# Altium PCB AIRZAI_LED_SENSE_FLEX_REVA.PcbDoc (part 1 of 2)
Units mm, origin at the board's own origin, x right, y up, seen from the top; angles counter-clockwise.
Board outline 70.94 x 92.79 mm, 2 copper layers (Top Layer, Bottom Layer); 62 components, 41 nets, 168 pads, 73 vias.
Unrouted connection lines stored in the file: 86.
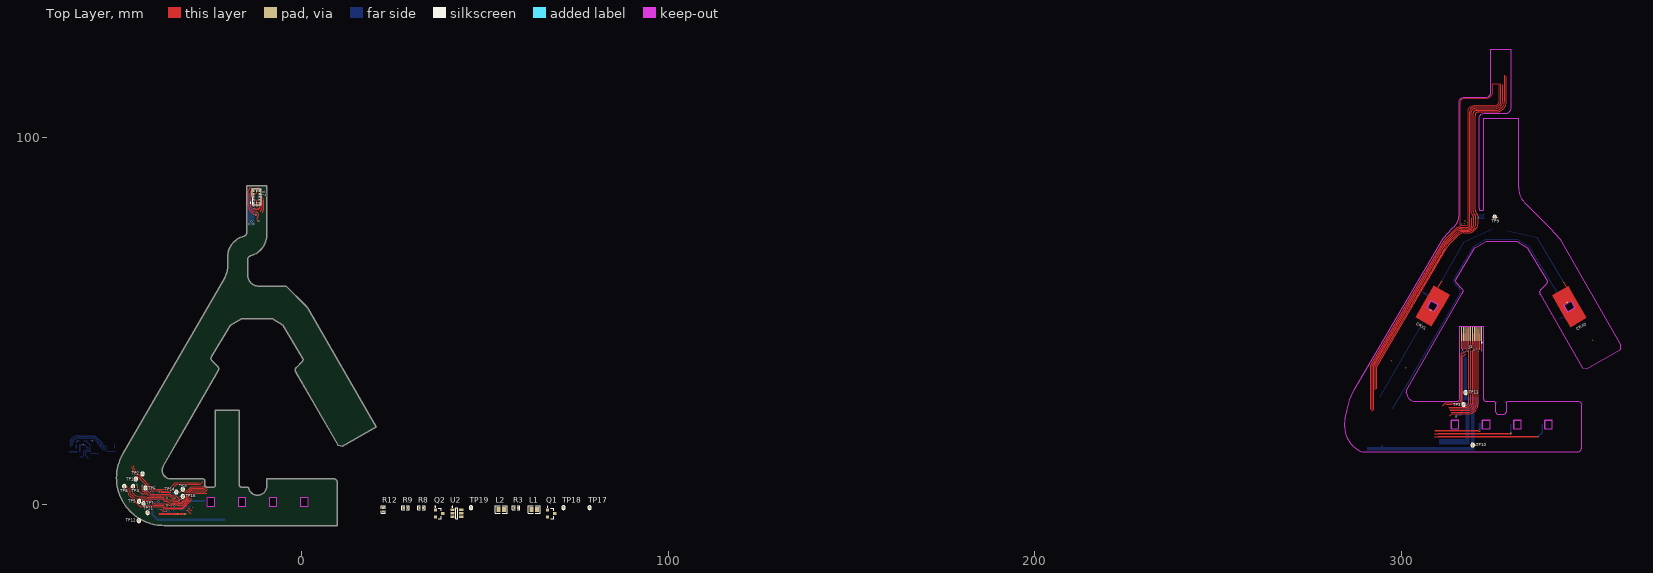
[diagram p0: Top Layer view]
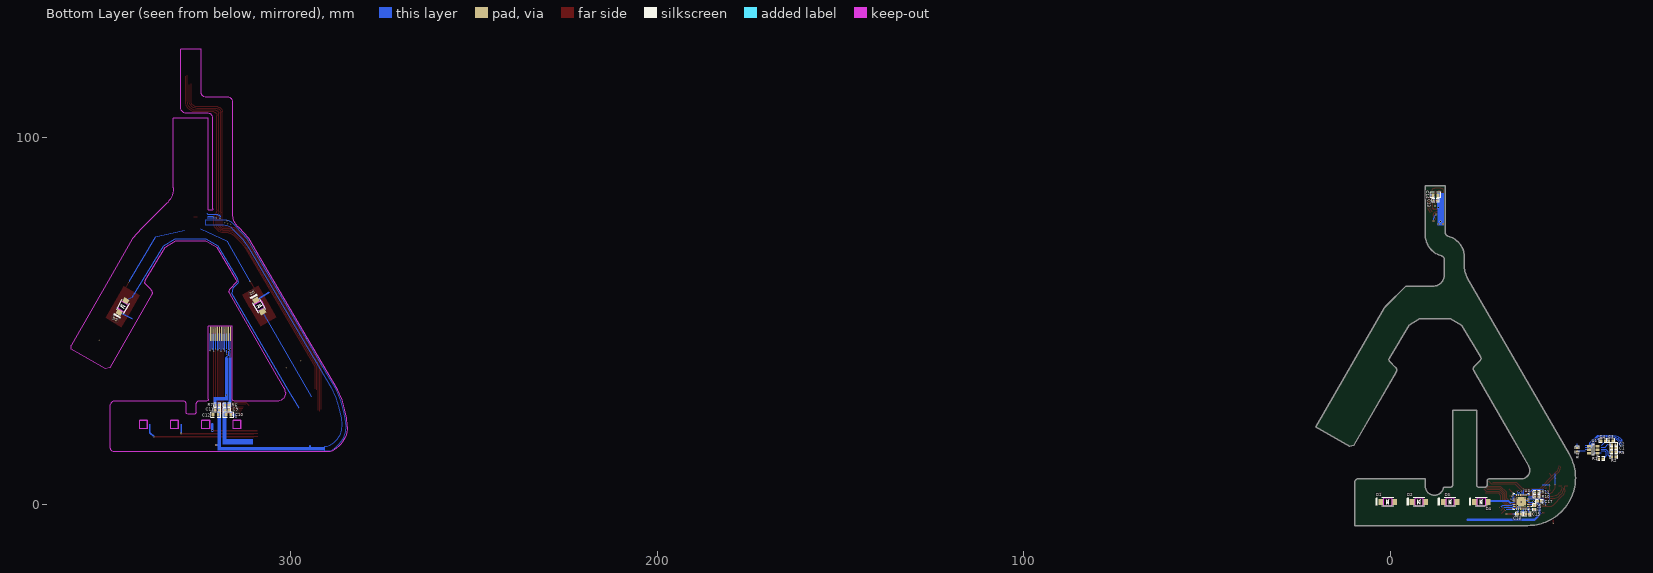
[diagram p1: Bottom Layer view, seen from below]

## Layer stack, top to bottom
Top Solder: solder mask 0.0102, Solder Resist, Dk 3.5
Top Layer: signal copper 0.0356
Dielectric 1: dielectric 0.32, FR-4, Dk 4.8
Bottom Layer: signal copper 0.0356
Bottom Solder: solder mask 0.0102, Solder Resist, Dk 3.5

## Board outline
-34.465,6.945 -27.054,6.946 -26.948,6.942 -26.72,6.84 -26.556,6.67 -26.469,6.446 -26.469,5.146 -26.382,4.923 -26.218,4.753 -25.99,4.651 -25.884,4.646 -24.362,4.651 -24.094,4.651 -23.87,4.738 -23.7,4.902 -23.599,5.13 -23.594,5.236 -23.594,25.651 -17.094,25.651 -17.094,5.194 -17.094,5.145 -17.003,4.92 -16.836,4.751 -16.606,4.654 -14.599,4.651 ccw(c-12.117,4.949) -9.617,4.949 -9.617,6.949 8.752,6.948 8.948,6.909 9.133,6.833 9.299,6.722 9.441,6.58 9.552,6.414 9.629,6.229 9.668,6.033 9.668,-5.816 -37.601,-5.814 cw(c-37.601,7.186) -48.859,13.686 -21.092,61.777 ccw(c-26.288,64.777) -20.288,64.777 -20.288,67.357 cw(c-14.288,67.356) -15.82,73.157 ccw(c-16.075,74.124) -15.075,74.124 -15.075,77.877 -15.075,77.893 -15.075,79.471 -15.075,86.971 -9.575,86.971 -9.575,79.471 -9.575,77.893 -9.575,77.876 -9.575,73.572 cw(c-15.575,73.572) -14.043,67.771 ccw(c-13.788,66.805) -14.788,66.805 -14.788,62.515 ccw(c-11.788,62.515) -11.788,59.515 -4.309,59.515 1.062,54.144 1.617,53.537 20.337,21.111 11.136,15.815 11.091,15.789 9.869,16.118 -1.648,36.137 -1.698,36.205 -1.769,36.36 -1.811,36.537 -1.812,36.707 -1.788,36.863 -1.728,37.022 -1.639,37.166 -1.524,37.291 -1.455,37.341 0.078,38.918 0.23,39.147 0.306,39.477 0.23,39.807 -5.207,48.878 -8.066,50.607 -16.066,50.642 -16.246,50.642 -16.422,50.641 -19.551,48.794 -24.747,40.124 -24.823,39.794 -24.747,39.463 -24.594,39.235 -23.061,37.657 -22.993,37.607 -22.877,37.482 -22.788,37.338 -22.729,37.178 -22.705,37.024 -22.706,36.854 -22.748,36.676 -22.819,36.521 -22.869,36.453 -32.634,19.483 -37.776,10.547 -37.875,10.374 -38.026,10.008 -38.121,9.611 -38.13,9.215 -38.091,8.833 -37.981,8.452 -37.81,8.095 -37.58,7.772 -37.3,7.492 -36.977,7.262 -36.621,7.09 -36.24,6.98 -36.031,6.947
cut-out: -0.417,-0.517 1.683,-0.517 1.683,1.783 -0.417,1.783
cut-out: -8.917,-0.517 -6.817,-0.517 -6.817,1.783 -8.917,1.783
cut-out: -17.417,-0.517 -15.317,-0.517 -15.317,1.783 -17.417,1.783
cut-out: -25.917,-0.517 -23.817,-0.517 -23.817,1.783 -25.917,1.783
cut-out: 339.166,20.639 341.266,20.639 341.266,22.939 339.166,22.939
cut-out: 330.666,20.639 332.766,20.639 332.766,22.939 330.666,22.939
cut-out: 322.166,20.639 324.266,20.639 324.266,22.939 322.166,22.939
cut-out: 313.666,20.639 315.766,20.639 315.766,22.939 313.666,22.939
cut-out: 345.44,52.452 344.396,54.265 346.389,55.412 347.433,53.599
cut-out: 307.092,53.76 309.086,52.613 310.129,54.426 308.136,55.573

## Design rules (kind name [scope] priority, off if disabled: settings)
Clearance Clearance_Board_Cutout_Electrodes [(InComponent('CRX0') OR InComponent('CRX1')) vs OnLayer('Multi-Layer')] p1: gap=0 ignorepadtopadclearanceinfootprint=FALSE
Clearance Clearance_Board_Cutout_Diodes [(InComponent('D1') OR InComponent('D2') OR InComponent('D3') OR InComponent('D4') OR InComponent('D5') OR InComponent('D6')) vs OnLayer('Multi-Layer')] p2: gap=0 ignorepadtopadclearanceinfootprint=FALSE
Clearance Clearance_Keepout [(OnLayer('Keep-Out Layer')) vs (InComponent('D1') OR InComponent('D2') OR InComponent('D3') OR InComponent('D4') OR InComponent('D5') OR InComponent('D6') OR InComponent('CRX0') OR InComponent('CRX1') OR InComponent('J1'))] p3: gap=0 ignorepadtopadclearanceinfootprint=FALSE
Clearance Clearance_GND_POLY_ELECTRODE [(InComponent('CRX0') OR InComponent('CRX1') OR InComponent('CRX2') OR InNet('NetCRX0_1') OR InNet('NetCRX1_1') OR InNet('NetCRX2_1') OR InNet('NetR4_2') OR InNet('NetR2_1') OR InNet('NetR1_1')) vs (InNet('GND') AND InPolygon)] p4: gap=0.762 ignorepadtopadclearanceinfootprint=FALSE
Clearance Clearance_POLYGON_KEEPOUT [(OnLayer('Keep-Out Layer')) vs (InNet('GND') AND InPolygon)] p5: gap=0.254 ignorepadtopadclearanceinfootprint=FALSE
Clearance Clearance_GND_POLY_REST [All vs (InNet('GND') AND InPolygon)] p6: gap=0.254 ignorepadtopadclearanceinfootprint=FALSE
Clearance [All] p7: gap=0.152 ignorepadtopadclearanceinfootprint=FALSE
MinimumSolderMaskSliver [All] p1: minsoldermaskwidth=0.025
PolygonConnect [All] p1: connectstyle=Direct reliefconductorwidth=0.254 reliefentries=4 polygonreliefangle="90 Angle" airgapwidth=0.254
RoomDefinition AIRZAI_LED_SENSE_FLEX_REVA [InComponentClass('AIRZAI_LED_SENSE_FLEX_REVA')] p1: confinementstyle=ConfineIn formatcopy=TRUE lockcomponents=FALSE outline -122.457,-96.252 249.907,-96.252 249.907,147.588 -122.457,147.588
RoutingVias [All] p1: holewidth=0.711 width=1.27 viastyle="Through Hole" minholewidth=0.203 minwidth=0.406 maxholewidth=0.711 maxwidth=1.27
SilkToSilkClearance [All] p1: silktosilkclearance=0.025
SilkToSolderMaskClearance [IsPad] p1: minsilkscreentomaskgap=0.051 clearancetoexposedcopper=TRUE
SolderMaskExpansion [All] p1: expansion=0.102
UnRoutedNet [All] p1: checkbadconnections=TRUE
Width [All] p1: maxlimit=2.54 minlimit=0.152 preferedwidth=0.254
26 further rules are at their usual default settings.

## Components (designator, comment, footprint, x,y, rotation, side; value= is the part's Value field where it differs from the comment)
C1 "22nF" 0402CAP -61.068,15.262 r0 bottom
C2 "0.1µF" 0402CAP -61.043,16.23 r0 bottom
C3 "22nF" 0402CAP -60.248,17.312 r0 bottom
C4 "0.1µF" 0402CAP -58.139,17.327 r180 bottom
C9 "0.1µF" 0402CAP 317.425,25.656 r180 bottom
C10 "10µF" 0603 317.044,24.386 r180 bottom
C11 "0.1µF" 0402CAP 320.138,25.668 r0 bottom
C12 "10µF" 0603 320.519,24.398 r0 bottom
C13 "0.1µF" 0402CAP -12.376,82.866 r0 bottom
C14 "4.7µF" 0603 -12.376,84.339 r180 bottom
C15 "CAP 1uF 16V 0402(1005)" CAPC0402(1005)60_M -37.536,-2.739 r0 bottom value=1uF
C16 "CAP 1uF 16V 0402(1005)" CAPC0402(1005)60_M -39.412,-0.858 r270 bottom value=1uF
C17 "CAP 1uF 16V 0402(1005)" CAPC0402(1005)60_M -40.712,0.772 r0 bottom value=1uF
C18 "CAP 1uF 16V 0402(1005)" CAPC0402(1005)60_M -35.275,-2.739 r0 bottom value=1uF
CRX0 "CONTACT POINT 1" "CONTACT_POINT_1CM _SQ" 345.914,53.932 r300 top
CRX1 "CONTACT POINT 1" "CONTACT_POINT_1CM _SQ" 308.611,54.093 r60 top locked
D1 "WHITE" LED1206_LTW-C230DS 0.633,0.633 r0 bottom locked
D2 "WHITE" LED1206_LTW-C230DS -7.867,0.633 r0 bottom locked
D3 "WHITE" LED1206_LTW-C230DS -16.367,0.633 r0 bottom locked
D4 "WHITE" LED1206_LTW-C230DS -24.867,0.634 r0 bottom
D5 "WHITE" LED1206_LTW-C230DS 308.611,54.093 r60 bottom
D6 "WHITE" LED1206_LTW-C230DS 345.914,53.932 r300 bottom
J1 "FFC Pads" FFC_Pads 319.227,46.546 r0 top
L1 "CB2012T100KR" 0805 63.446,-1.484 r0 top value=10uH
L2 "CB2012T100KR" 0805 54.429,-1.484 r0 top value=10uH
Q1 "NTR4003NT1G" SOT-23-3-NTR4003NT1G 68.018,-2.551 r0 top
Q2 "NTR4003NT1G" SOT-23-3-NTR4003NT1G 37.436,-2.551 r0 top
R1 "10k 0402(1005)" 0402 -57.535,12.409 r0 bottom value=10k
R2 "100R 0402(1005)" 0402 -61.065,12.892 r180 bottom value=100
R3 "Jumper 0402(1005)" 0402 58.493,-0.976 r0 top value=0R
R4 "DNP 0402(1005)" 0402 -51.061,14.867 r270 bottom value=DNP
R5 "DNP 0402(1005)" 0402 -61.068,14.327 r0 bottom value=DNP
R6 "100R 0402(1005)" 0402 317.445,27.016 r180 bottom value=100
R7 "10k 0402(1005)" 0402 320.089,26.995 r0 bottom value=10k
R8 "Jumper 0402(1005)" 0402 32.61,-0.976 r0 top value=0R
R9 "DNP 0402(1005)" 0402 28.292,-0.976 r0 top value=DNP
R10 "Jumper 0402(1005)" 0402 -40.022,2.087 r0 bottom value=0R
R11 "Jumper 0402(1005)" 0402 -40.022,3.23 r0 bottom value=0R
R12 "DNP 0402(1005)" 0402 22.196,-1.484 r90 top value=DNP
TP1 "Test Point" TP_0.9MM -45.343,6.844 r90 top
TP2 "Test Point" TP_0.9MM -43.514,8.287 r90 top
TP3 "Test Point" TP_0.9MM 317.044,27.185 r90 top
TP4 "Test Point" TP_0.9MM -46.054,4.882 r90 top
TP5 "Test Point" TP_0.9MM -44.429,0.787 r90 top
TP6 "Test Point" TP_0.9MM -42.692,4.394 r90 top
TP7 "Test Point" TP_0.9MM -43.2,0.152 r90 top
TP8 "Test Point" TP_0.9MM -48.493,4.882 r90 top
TP9 "Test Point" TP_0.9MM 325.523,78.348 r90 top
TP10 "Test Point" TP_0.9MM 319.533,16.136 r90 top
TP11 "Test Point" TP_0.9MM -42.108,-2.312 r90 top
TP12 "Test Point" TP_0.9MM -44.505,-4.484 r90 top
TP13 "Test Point" TP_0.9MM 317.603,30.491 r90 top
TP14 "Test Point" TP_0.9MM -34.285,3.336 r90 top
TP15 "Test Point" TP_0.9MM -32.504,4.089 r90 top
TP16 "Test Point" TP_0.9MM -32.507,2.159 r90 top
TP17 "Test Point" TP_0.9MM 78.508,-0.951 r90 top
TP18 "Test Point" TP_0.9MM 71.396,-0.951 r90 top
TP19 "Test Point" TP_0.9MM 46.148,-0.951 r90 top
U1 "AT42QT1010-TSHR" SOT-23-6-AT42QT1010-TSHR -55.422,14.892 r0 bottom
U2 "AT42QT1010-TSHR" SOT-23-6-AT42QT1010-TSHR 42.287,-2.475 r0 top
U3 "LP55231SQE/NOPB" WQFN-24-LP55231SQE/NOPB -35.785,0.655 r0 bottom value="IC LED DRIVER RGLTR DIM 24WQFN"
U7 "VL53L0CXV0DH/1" VL53L0X -12.338,83.895 r270 top

## Footprints (in the part's own frame and the unit in brackets; to place one, negate y for a bottom-side part, rotate by r counter-clockwise, add the part's x,y. Pads: shape width x height; smd on the part's side, far side on the other; paste and mask are expansions set on the pad)
0402 [mm] "Chip Resistor, Body 1.1x0.5mm, IPC High Density"
  rect 0.6x0.6 smd: 1(-0.5,0) 2(0.5,0)
  silkscreen extent -1.02,-0.51 1.02,0.51, body extent -0.5,-0.25 0.5,0.25, height 0.27
0402CAP [mm] "Chip Capacitor, Body 1.1x0.5mm, IPC High Density"
  rect 0.6x0.6 smd: 1(-0.5,0) 2(0.5,0)
  silkscreen extent -1.02,-0.51 1.02,0.51, body extent -0.5,-0.3 0.5,0.3, height 0.19
0603 [mm] "Chip Resistor, Body 1.6x0.8mm, IPC High Density"
  rect 0.8x0.9 smd: 1(-0.7,0) 2(0.7,0)
  silkscreen extent -1.4,-0.76 1.4,0.76, body extent -0.8,-0.41 0.8,0.4, height 0.37
0805 [mm] "Chip Resistor, Body 2.0x1.3mm, IPC High Density"
  rect 1.1x1.4 smd: 1(-0.75,0) 2(0.75,0)
  silkscreen extent -1.65,-1.02 1.65,1.02, body extent -1.02,-0.64 0.98,0.62, height 0.47
CAPC0402(1005)60_M [mm] "Chip Capacitor, Body 1.0x0.5mm, Height 0.6mm, IPC Low Density"
  rect 0.72x0.72 smd: 1(-0.5,0) 2(0.5,0)
  silkscreen extent -1.02,-0.51 1.02,0.51, body extent -0.55,-0.3 0.55,0.3, height 0.6
"CONTACT_POINT_1CM _SQ" [mm]
  rect 0.4x0.4 smd paste-2 mask-2: 1(-1.312,-0.018)
  Top Layer region: -2.48,2.5 -1.05,1.15 1.05,1.15 1.05,-2.5 5,-2.5 5,2.5
  Top Layer region: 2.48,-2.5 1.05,-1.15 -1.05,-1.15 -1.05,2.5 -5,2.5 -5,-2.5
FFC_Pads [mm] "(0.50mm"
  rect 0.3x4 smd: 1(2.75,0) 2(2.25,0) 3(1.75,0) 4(1.25,0) 5(0.75,0) 6(0.25,0) 7(-0.25,0) 8(-0.75,0) 9(-1.25,0) 10(-1.75,0) 11(-2.25,0) 12(-2.75,0)
  rect 0.3x4 smd far side: 1(2.75,0) 2(2.25,0) 3(1.75,0) 4(1.25,0) 5(0.75,0) 6(0.25,0) 7(-0.25,0) 8(-0.75,0) 9(-1.25,0) 10(-1.75,0) 11(-2.25,0) 12(-2.75,0)
  silkscreen extent 2.64,-2.56 2.89,-2.31
LED1206_LTW-C230DS [mm] "Chip Capacitor, Body 3.2x1.6mm, IPC High Density"
  rect 1.5x1.6 smd paste-0.1 mask+0.07: 1(1.775,0) 2(-1.775,0)
  silkscreen extent -1.6,-1.13 3.19,1.13, body extent -1.63,-0.8 1.63,0.8, height 0.31
SOT-23-3-NTR4003NT1G [mm] "SOT23, 3-Leads, Body 2.92x1.3mm, Pitch 0.95mm"
  rect 0.9x0.8 smd: 1(-1,0.95) 2(-1,-0.95) 3(1,0)
  silkscreen extent -1.12,-1.46 0.65,2.02, body extent -0.65,-1.46 0.65,1.46, height 1.11
SOT-23-6-AT42QT1010-TSHR [mm] "SOT23, 6-Leads, Body 2.9x1.6mm, Pitch 0.95mm, Lead Span 2.8mm, IPC Medium Density"
  rect 1.1x0.65 smd: 1(-1.2,0.95) 2(-1.2,0) 3(-1.2,-0.95) 4(1.2,-0.95) 5(1.2,0) 6(1.2,0.95)
  silkscreen extent -1.32,-1.5 0.25,1.95, body extent -0.87,-1.5 0.87,1.5, height 1.45
TP_0.9MM [mm] "0.9MM DIA TESTPOINT"
  round 0.75 smd paste-5 mask+0.05: 1(0,0)
  silkscreen extent -0.5,-0.5 0.5,0.5
VL53L0X [mm]
  rect 0.58x0.5 smd: 1(1.64,-0.8)
  rect 0.5x0.5 smd: 2(0.8,-0.8) 3(0,-0.8) 4(-0.8,-0.8) 5(-1.6,-0.8) 6(-1.6,0) 7(-1.6,0.8) 8(-0.8,0.8) 9(0,0.8) 10(0.8,0.8) 11(1.6,0.8) 12(1.6,0)
  silkscreen extent -2.2,-1.79 2.2,1.3, body extent -2.2,-1.3 2.2,1.3, height 3.72
WQFN-24-LP55231SQE/NOPB [mm] "QFN, 24-Leads, Body 3.97x3.97mm, Pitch 0.50mm, Thermal Pad 2.60x2.60mm, IPC Medium Density"
  rect 0.6x0.25 smd: 1(-1.9,1.25) 2(-1.9,0.75) 3(-1.9,0.25) 4(-1.9,-0.25) 5(-1.9,-0.75) 6(-1.9,-1.25) 13(1.9,-1.25) 14(1.9,-0.75) 15(1.9,-0.25) 16(1.9,0.25) 17(1.9,0.75) 18(1.9,1.25)
  rect 0.25x0.6 smd: 7(-1.25,-1.9) 8(-0.75,-1.9) 9(-0.25,-1.9) 10(0.25,-1.9) 11(0.75,-1.9) 12(1.25,-1.9) 19(1.25,1.9) 20(0.75,1.9) 21(0.25,1.9) 22(-0.25,1.9) 23(-0.75,1.9) 24(-1.25,1.9)
  rect 2.6x2.6 smd: 25(0,0)
  silkscreen extent -2.92,-2.2 2.2,2.2, body extent -2.01,-2.01 2.01,2.01, height 0.8

## Part data
C1 C3: library part C0402-100n, "Capacitor, X7R, ±10%", Case/Package=0402, Case Code (Metric)=1005, Dielectric=X7R, Manufacturer=TDK, Manufacturer Part Number=CGA2B2X7R1E223K050BA, Max Operating Temperature=125°C, Min Operating Temperature=-55°C, Package Quantity=1, Ratings=AEC-Q200, Supplier Part Number 1=445-5609-1-ND, Tolerance=10%, Voltage Rating=25V, Capacitance=22nF, Case Code (Imperial)=0402, ComponentLink1Description=http://www.mouser.com/ds/2/281/c02e-2905.pdf?src-supplier=Mouser, ComponentLink1URL=http://www.mouser.com/ds/2/281/c02e-2905.pdf?src-supplier=Mouser, ComponentLink2Description=http://psearch.en.murata.com/capacitor/product/GRM155R71H333KE14%23.pdf?src-supplier=Avnet, ComponentLink2URL=http://psearch.en.murata.com/capacitor/product/GRM155R71H333KE14%23.pdf?src-supplier=Avnet, ComponentLink3Description=http://search.murata.co.jp/Ceramy/image/img/A01X/G101/ENG/GRM155R71H333KE14-01.pdf?src-supplier=Digi-Key, ComponentLink3URL=http://search.murata.co.jp/Ceramy/image/img/A01X/G101/ENG/GRM155R71H333KE14-01.pdf?src-supplier=Digi-Key, ComponentLink4Description=https://datasheet.ciiva.com/24220/cga2b2x7r1e223k050ba-265693-24220032.pdf?src-supplier=Mouser, ComponentLink4URL=https://datasheet.ciiva.com/24220/cga2b2x7r1e223k050ba-265693-24220032.pdf?src-supplier=Mouser, ComponentLink5Description=https://datasheet.ciiva.com/7975/1807242-7975269.pdf?src-supplier=Element14, ComponentLink5URL=https://datasheet.ciiva.com/7975/1807242-7975269.pdf?src-supplier=Element14, Composition=Ceramic, Depth=0.5mm, Height=0.5mm, Length=1mm, Mount="Surface Mount", Packaging="Tape and Reel", Pricing 1="1 = 0.10000, 10 = 0.06500, 100 = 0.02910, 500 = 0.02080, 1000 = 0.01635, 2500 = 0.01486, 5000 = 0.01367 (USD)", REACH SVHC="No SVHC", RoHS=Yes, Stock 1=499669, Supplier 1=Digi-Key, Termination=SMD/SMT, Thickness=0.022inch, Voltage Rating (DC)=25V, Weight=2.3E-05oz, Width=0.5mm
C2 C4 C9 C11 C13: library part C0402-100n, "Capacitor, X7R, ±10%", Case-EIA=0402, Case-Metric=1005, Manufacturer=TDK, Manufacturer Part Number=C1005X7R1C104K, Rated Voltage="16 V", Supplier Part Number 1=445-4952-2-ND, Tolerance=±20%, Max Thickness="0.6 mm", Note="16V ±10% X7R", Pin Count=2, Supplier 1=Digi-Key, Technology=SMT
C10 C12: library part C0402-100n, "Capacitor, X7R, ±10%", Case-EIA=0603, Case-Metric=1608, Manufacturer=MURATA, Manufacturer Part Number=GRM188R60J106ME47D, Rated Voltage="6.3 V", Supplier Part Number 1=490-3896-6-ND, Tolerance=±20%, Max Thickness="0.9 mm", Note="6.3volts X5R 20%", Pin Count=2, Supplier 1=Digi-Key, Technology=SMT
C14: library part "C0603-1µ0 X7R", "Capacitor, X7R, ±10%", Case-EIA=0402, Case-Metric=1005, Manufacturer=TDK, Manufacturer Part Number=C1005X5R0J475M, Rated Voltage="6.3 V", Supplier Part Number 1=445-7395-2-ND, Tolerance=±20%, Max Thickness="0.6 mm", Note="6.3volts X5R 20%", Supplier 1=Digi-Key, Technology=SMT
C15 C16 C17 C18: library part CAP, "CAP 1uF 16V ±10% 0402 (1005 Metric) Thickness 0.6mm SMD", Case-EIA=0402, Case-Metric=1005, Manufacturer="Taiyo Yuden", Manufacturer Part Number=JMK105C6105KV-F, Rated Voltage="6.3 V", Supplier Part Number 1=587-3381-1-ND, Tolerance=±10%, Max Thickness="0.6 mm", Note="CAP CER 1UF 6.3V X6S 0402", Pin Count=2, Supplier 1=Digi-Key, Technology=SMT
CRX0 CRX1: library part WIRE_POINT
D1 D2 D3 D4 D5 D6: library part LED_LTW-C230DS, Case-EIA=1206, Case-Metric=3216, Manufacturer=LITEON, Manufacturer Part Number=LTW-C230DS, Supplier Part Number 1=160-2221-1-ND, Max Thickness=1.10mm, Note="REVERSE MOUNT CHIP LED", Supplier 1=Digi-Key
J1: library part FFC_PADS, "0.5 mm Pitch FFC Pads", ComponentLink1URL=http://www.molex.com/molex/index.jsp, ComponentLink2Description=Datasheet, ComponentLink2URL=http://www.molex.com/webdocs/datasheets/pdf/en-us/0528921233_FFC_FPC_CONNECTORS.pdf, ComponentLink3Description="Package Specification", ComponentLink3URL=http://www.molex.com/pdm_docs/sd/528921233_sd.pdf, Note=DNP
L1 L2: "Inductor, 10 µH, 0.5A, 0.65 ohm, SMD", Case/Package=0805, Case Code (Metric)=2012, Current Rating=520mA, DC Resistance (DCR)=500mR, Inductance=10uH, Inductance Tolerance=10%, Manufacturer="Taiyo Yuden", Max DC Current=200mA, Max Operating Temperature=105°C, Min Operating Temperature=-40°C, Package Quantity=3000, Self Resonant Frequency=32MHz, Supplier Part Number 1=587-2452-1-ND, Test Frequency=2.52MHz, Value1="0.65 ohm", Value2=0.5A, ValueDisplayed=10µH, Case Code (Imperial)=0805, ComponentLink1Description="Datasheet link", ComponentLink1URL=http://www.yuden.co.jp/ut/product/category/inductor/BRC2012T2R2MD.pdf, ComponentLink2Description=https://datasheet.ciiva.com/1040/cb2012t100kr-ss-1040384.pdf?src-supplier=Digi-Key, ComponentLink2URL=https://datasheet.ciiva.com/1040/cb2012t100kr-ss-1040384.pdf?src-supplier=Digi-Key, Composition=Wirewound, Core Material=Ferrite, Halogen Free="Halogen Free", Height=1.25mm, Height - Seated (Max)=0.057inch, Lead Free="Lead Free", Length=0.079inch, Manufacturer Part Number=CB2012T100KR, Mount="Surface Mount", Number of Pins=2, Packaging="Tape and Reel", PartNumber=CB2012T100KR, Pricing 1="1 = 0.23000, 10 = 0.20700, 100 = 0.14230, 500 = 0.12162, 1000 = 0.09315 (USD)", REACH SVHC=Unknown, RoHS=Yes, Saturation Current=200mA, Shielding=Unshielded, Stock 1=18059, Supplier 1=Digi-Key, Technology=Wirewound, Termination=SMD/SMT, Tolerance=10%, Width=0.049inch
Q1 Q2: "N-Channel 30V 500mA (Ta) 690mW (Ta) Surface Mount SOT-23-3 (TO-236)", Case/Package=SOT-23-3, Continuous Drain Current (ID)=500mA, Drain to Source Breakdown Voltage=30V, Drain to Source Resistance=1R, Gate to Source Voltage (Vgs)=20V, Input Capacitance=21pF, Manufacturer="ON Semiconductor", Max Operating Temperature=150°C, Max Power Dissipation=690mW, Min Operating Temperature=-55°C, Package Quantity=1, Supplier Part Number 1=NTR4003NT1GOSCT-ND, Threshold Voltage=1.4V, ComponentLink1Description="Manufacturer URL", ComponentLink1URL=http://www.onsemi.com/, ComponentLink2Description=Datasheet, ComponentLink2URL=http://www.onsemi.cn/pub_link/Collateral/NTR4003N-D.PDF, ComponentLink3Description="Package Specification", ComponentLink3URL=http://www.onsemi.cn/pub_link/Collateral/318-08.PDF, ComponentLink4Description=https://datasheet.ciiva.com/5751/86005-5751936.pdf?src-supplier=Farnell, ComponentLink4URL=https://datasheet.ciiva.com/5751/86005-5751936.pdf?src-supplier=Farnell, ComponentLink5Description=https://datasheet.ciiva.com/26144/ntr4003n-d-26144544.pdf?src-supplier=Avnet+Europe, ComponentLink5URL=https://datasheet.ciiva.com/26144/ntr4003n-d-26144544.pdf?src-supplier=Avnet+Europe, ComponentLink6Description=https://datasheet.ciiva.com/30479/0900766b8120606c-30479654.pdf?src-supplier=RSComponents, ComponentLink6URL=https://datasheet.ciiva.com/30479/0900766b8120606c-30479654.pdf?src-supplier=RSComponents, ComponentLink7Description=https://datasheet.ciiva.com/30479/0900766b8120606c-30479655.pdf?src-supplier=RSComponents, ComponentLink7URL=https://datasheet.ciiva.com/30479/0900766b8120606c-30479655.pdf?src-supplier=RSComponents, ComponentLink8Description=https://datasheet.ciiva.com/936/ntr4003n-d-936807.pdf?src-supplier=Digi-Key, ComponentLink8URL=https://datasheet.ciiva.com/936/ntr4003n-d-936807.pdf?src-supplier=Digi-Key, ComponentLink9Description=https://datasheet.ciiva.com/8114/ntr4003n-d-8114935.pdf?src-supplier=Avnet, ComponentLink9URL=https://datasheet.ciiva.com/8114/ntr4003n-d-8114935.pdf?src-supplier=Avnet, ComponentLink10Description=https://datasheet.ciiva.com/936/ntr4003n-d-936808.pdf?src-supplier=Digi-Key, ComponentLink10URL=https://datasheet.ciiva.com/936/ntr4003n-d-936808.pdf?src-supplier=Digi-Key, ComponentLink11Description=https://datasheet.ciiva.com/936/ntr4003n-d-936809.pdf?src-supplier=Digi-Key, ComponentLink11URL=https://datasheet.ciiva.com/936/ntr4003n-d-936809.pdf?src-supplier=Digi-Key, ComponentLink12Description=https://datasheet.ciiva.com/8059/86005-8059403.pdf?src-supplier=Element14, ComponentLink12URL=https://datasheet.ciiva.com/8059/86005-8059403.pdf?src-supplier=Element14, ComponentLink13Description=https://datasheet.ciiva.com/8059/86005-8059404.pdf?src-supplier=Element14, ComponentLink13URL=https://datasheet.ciiva.com/8059/86005-8059404.pdf?src-supplier=Element14, ComponentLink14Description=https://datasheet.ciiva.com/22656/86005-22656046.pdf?src-supplier=Farnell, ComponentLink14URL=https://datasheet.ciiva.com/22656/86005-22656046.pdf?src-supplier=Farnell, Contact Plating=Tin, Element Configuration=Single, Fall Time=47.9ns, Height=1.01mm, Lead Free="Lead Free", Length=3.04mm, Manufacturer Part Number=NTR4003NT1G, Nominal Vgs=1.4V, Number of Elements=1, Number of Pins=3, On-State Resistance=1R, Packaging="Tape and Reel", Power Dissipation=690mW, Pricing 1="1 = 0.30000, 10 = 0.27200, 100 = 0.15230, 500 = 0.08160, 1000 = 0.05548 (USD)", Radiation Hardening=No, Rds On Max=1.5R, REACH SVHC="No SVHC", Rise Time=47.9ns, RoHS=Yes, Stock 1=83954, Supplier 1=Digi-Key, Turn-Off Delay Time=65.1ns, Turn-On Delay Time=16.7ns, Width=1.4mm
R1 R7: library part RES, "10k 0.063W 1% 0402 (1005 Metric)  SMD", Case-EIA=0402, Case-Metric=1005, Manufacturer=Yageo, Manufacturer Part Number=RC0402FR-0710KL, Power=0.063W, Supplier Part Number 1=311-10.0KLRCT-ND, Tolerance=None, Max Thickness="0.6 mm", Note="RES SMD 10K OHM 1% 1/16W 0402", Pin Count=2, Supplier 1=Digi-Key, Technology=SMT
R2 R6: library part RES, "100 0.063W 1% 0402 (1005 Metric)  SMD", Case-EIA=0402, Case-Metric=1005, Manufacturer=Yageo, Manufacturer Part Number=RC0402FR-07100RL, Power=None, Supplier Part Number 1=311-100LRCT-ND, Max Thickness="0.6 mm", Note="0.1W JUMPER", Pin Count=2, Supplier 1=Digi-Key, Technology=SMT, Tolerance=None
R3 R8 R10 R11: library part RES, "Jumper 0402 (1005 Metric)", Case-EIA=0402, Case-Metric=1005, Manufacturer=Panasonic, Manufacturer Part Number=ERJ-2GE0R00X, Power=None, Supplier Part Number 1=P0.0JCT-ND, Max Thickness="0.6 mm", Note="0.1W JUMPER", Pin Count=2, Supplier 1=Digi-Key, Technology=SMT, Tolerance=None
R4 R5 R9 R12: library part RES, "DNP", Case-EIA=0402, Case-Metric=1005, Power="0.0625 W", Tolerance=None, Manufacturer Part Number=DNP, Max Thickness="0.6 mm", Note=DNP, Pin Count=2, Supplier 1=Digi-Key, Supplier Part Number 1=DNP, Technology=SMT
U1 U2: "One-channel Touch Sensor IC with Reset Timer, -40° to +85° C, 6-pin SOT23", Supplier Part Number 1=AT42QT1010-TSHRCT-ND, Code_IPC=SOT26A-6, Code_JEDEC=MO-178-AB, ComponentLink1Description="Manufacturer URL", ComponentLink1URL=http://www.atmel.com/, ComponentLink2Description=Datasheet, ComponentLink2URL=http://www.atmel.com/Images/doc9541.pdf, DatasheetVersion="revH, May-2010", PackageDescription="6-Lead, 2.90 x 1.60 mm Plastic Small Outline Package (SOT23)", PackageReference=6ST1, PackageVersion="revA, Jun-2008", PartNumber=AT42QT1010-TSHR
U3: "Imported", Case-EIA=24-WQFN, Manufacturer=TI, Supplier Part Number 1=296-39059-1-ND, Tolerance=None, Built_By=EMA_UL_Team, C="Copyright (C) 2016 Accelerated Designs. All rights reserved", Manufacturer_Part_Number=LP55231SQE/NOPB, Manufacturer Part Number=LP55231SQE/NOPB, Note="IC LED DRIVER RGLTR DIM 24WQFN", RefDes=RefDes, Supplier 1=Digi-Key, Technology=SMT, Type=DEV, Vendor="Texas Instruments"
U7: library part VL53L0X, Case-EIA=LGA12, Manufacturer=ST, Supplier Part Number 1=497-16538-1-ND, Tolerance=None, Manufacturer Part Number=VL53L0CXV0DH/1, Note="SENSOR LASER DISTANCE TOF 2M", Supplier 1=Digi-Key, Technology=SMT

## Via types
v1: diameter 0.406, hole 0.203, Top Layer to Bottom Layer, tented both sides, 51 vias
v2: diameter 0.508, hole 0.254, Top Layer to Bottom Layer, tented both sides, 17 vias
v3: diameter 0.508, hole 0.203, Top Layer to Bottom Layer, 5 vias

## Nets (pads, with @x,y where several pads share a name; then routed paths per layer and width w, separated by ;. In a path a pad name is that pad's centre, name@x,y a point inside that pad or via, vN(x,y) a via of type N, cw(c..) or ccw(c..) an arc to the next point about the centre after c; other vN are vias at no path point)
3V3: C2.1 C4.1 C11.1 C12.1 C13.1 C14.2 D5.2 D6.2 L2.2 R3.2 R8.2 TP10.1 TP12.1 U1.5 U2.5 U7.1 U7.11 | length 7.9
  Top Layer w0.381: U7.1@-13.138,82.255 v2(-13.138,80.931) -12.759,80.553 -11.934,80.553 -11.538,80.949 U7.11@-11.538,82.215
  Top Layer w0.508: v1(-44.505,-5.17) TP12.1@-44.505,-4.484 ; TP10.1@319.533,16.136 v2(320.401,16.136)
  Bottom Layer w0.508: 294.819,15.882 294.819,15.004 ccw(c294.906,15.004) 294.845,14.942 ; 319.533,16.136 v2(320.401,16.136)
  other v1: 316.361,76.359 317.171,76.537 318.035,76.773 317.425,77.198
  other v2: -13.219,76.44 -14.433,76.465 -13.798,77.176
+5V: C9.1 C10.1 C17.2 L1.2 TP11.1 U3.3 | length 28.4
  Top Layer w0.381: TP11.1@-42.108,-2.312 -41.397,-2.312 v1(-41.371,-2.337)
  Bottom Layer w0.254: C17.2@-40.422,0.735 -40.212,0.735 -39.138,0.735 -38.807,0.405 U3.3@-37.685,0.405
  Bottom Layer w0.381: v1(-41.371,-2.337) -40.79,-2.337 -40.765,-2.362 ; -40.765,-0.21 -40.212,0.342 -40.212,0.735 C17.2@-40.212,0.772
  Bottom Layer w0.508: -40.765,-1.788 -40.765,-0.21
  Bottom Layer w0.635: -40.765,-1.788 -40.765,-2.362 -40.765,-2.893 -39.395,-4.263 -21.111,-4.263
  other v2: -39.145,0.742
CAP1_TOUCH_OUT: J1.6 Q1.1 R4.1 TP5.1 TP9.1 U1.1 | length 1.1
  Bottom Layer w0.203: R4.1@-51.061,15.367 -51.061,16.442
CAP2_TOUCH_OUT: J1.8 Q2.1 R9.1 TP3.1 TP19.1 U2.1 | length 26.6
  Top Layer w0.152: TP3.1@317.044,27.185 ccw(c317.452,27.593) 317.452,27.016 317.779,27.016 ccw(c317.779,27.593) 318.187,27.185 ccw(c317.487,27.886) 318.477,27.886 v1(318.477,42.262) J1.8@318.477,46.546 J1.8@318.477,48.181
  Bottom Layer w0.203: v1(318.477,42.262) J1.8@318.477,46.546
EN: J1.4 TP7.1 U3.5 | length 60.3
  Top Layer w0.152: TP7.1@-43.2,0.152 -43.15,0.202 -43.1,0.152 -43.02,0.233 -42.554,-0.234 v1(-42.54,-0.234) ; v1@-42.554,-0.301 -37.94,-0.301 -37.33,-0.91 -32.707,-0.91 -30.687,1.109 -30.687,2.577 -29.824,3.441 -26.319,3.441 -25.709,4.05 ; 313.615,25.102 318.077,25.102 ccw(c318.077,27.642) 319.873,25.846 ccw(c318.412,27.306) 320.477,27.306 v1(320.477,42.262) J1.4@320.477,46.546 J1.4@320.477,48.181
  Bottom Layer w0.152: v1(-42.54,-0.234) -42.54,0.204 -42.21,0.533 -42.21,1.142 -41.947,1.405 U3.5@-37.685,1.405
  Bottom Layer w0.203: v1(320.477,42.262) J1.4@320.477,46.546
GND: C2.2 C4.2 C9.2 C10.2 C11.2 C12.2 C13.2 C14.1 C17.1 C18.2 D1.1 D2.1 D3.1 D4.1 J1.1 J1.2 Q1.2 Q2.2 R4.2 R5.2 R9.2 R10.1 R11.1 R12.2 U1.2 U2.2 U3.4 U3.20 U3.21 U3.25 U7.2 U7.3 U7.4 U7.6 U7.12 | length 62.4
  Top Layer w0.203: v1(321.477,42.262) J1.2@321.477,46.546 ; v1@321.977,41.754 J1.1@321.977,46.546
  Top Layer w0.254: U7.6@-12.338,85.495 -12.338,84.962 -12.604,84.695 U7.4@-13.138,84.695 U7.3@-13.138,83.895 U7.2@-13.138,83.095 -12.655,83.095 -12.338,82.777 U7.12@-12.338,82.295 -12.338,81.545 v2(-12.223,81.431)
  Top Layer w0.635: -38.857,-2.693 v2(-33.726,-2.693) v2(-31.805,-2.693)
  Bottom Layer w0.203: -57.622,13.892 -55.69,13.892 -55.63,13.832 ; v1(321.477,42.262) J1.2@321.477,46.546 ; v1(321.977,41.834) J1.1@321.977,46.575
  Bottom Layer w0.254: -53.222,14.392 -51.086,14.392 R4.2@-51.061,14.367 ; U3.4@-37.685,0.905 -36.035,0.905 v3(-35.785,0.655) U3.25@-35.535,0.405 ; U3.21@-35.535,-1.245 U3.25@-35.535,0.405 ; C18.2@-34.775,-2.739 -34.775,-2.227 -35.035,-1.968 U3.20@-35.035,-1.245 -35.035,-0.095 U3.25@-35.535,0.405
  Bottom Layer w0.356: -61.568,15.262 -61.568,16.205 -61.543,16.23 ; v1(-61.446,17.058) -61.191,17.312 -60.748,17.312 ; -57.639,17.327 -57.624,17.312 v1(-56.925,17.312)
  Bottom Layer w0.381: v1(-41.879,0.178) -41.285,0.772 C17.1@-41.212,0.772 ; v1(-41.252,3.353) -41.129,3.23 R11.1@-40.522,3.23 R10.1@-40.522,2.087 ; C13.2@-11.876,82.866 -11.876,84.139 C14.1@-11.676,84.339 -11.574,84.441 v1(-10.763,84.441) ; 305.848,57.791 309.498,55.63 ; 343.333,50.553 346.802,52.395
  Bottom Layer w0.635: C18.2@-34.775,-2.739 -34.729,-2.693 v2(-33.726,-2.693) ; v2(314.961,23.904) 315.444,24.386 C10.2@316.344,24.386 316.344,25.075 C9.2@316.925,25.656
  other v1: 301.288,37.269 297.258,39.199 352.299,44.813
  other v3: -36.825,-0.385 -34.745,-0.385 -36.825,1.695 -34.745,1.695
INT: J1.5 TP6.1 U3.7 | length 63.1
  Top Layer w0.152: v1(-43.607,1.016) -41.182,1.016 -40.323,0.156 -36.622,0.156 -36.135,-0.33 -35.453,-0.33 -34.967,0.156 -34.434,0.156 -34.003,-0.275 -32.58,-0.275 -31.094,1.211 -31.094,2.78 -29.976,3.898 -26.58,3.898 -25.945,4.533 ; TP6.1@-42.692,4.394 -42.514,4.394 v1(-42.133,4.013) ; 313.38,25.585 318.187,25.585 ccw(c318.187,27.486) 319.531,26.142 319.686,26.296 ccw(c318.982,27) 319.977,27 v1(319.977,41.834) J1.5@319.977,46.546
  Bottom Layer w0.152: v1(-43.607,1.016) -43.605,1.018 -43.605,2.542 v1(-42.133,4.013) -42.083,3.962 -38.772,3.962 -37.365,2.555 U3.7@-37.035,2.555
  Bottom Layer w0.203: v1(319.977,41.834) J1.5@319.977,46.575
NetC1_1: C1.1 R1.1 U1.3 | length 3.4
  Bottom Layer w0.254: R1.1@-58.24,12.454 -58.957,13.171 -58.957,14.162 -58.727,14.392 -57.622,14.392
NetC1_2: C1.2 U1.4 | length 6.1
  Top Layer w0.254: 325.523,78.348 326.437,78.348
  Bottom Layer w0.254: -59.992,16.173 -59.292,16.173 -58.511,15.392 -57.622,15.392
  Bottom Layer w0.381: -60.568,14.327 C1.2@-60.568,15.262 -60.568,16.205 -60.543,16.23 ; -60.559,16.173 -59.992,16.173
  other v1: -59.668,16.169
NetC3_1: C3.1 R7.1 U2.3
NetC3_2: C3.2 U2.4
NetC15_1: C15.1 U3.1 | length 2.3
  Bottom Layer w0.254: C15.1@-38.036,-2.739 -38.036,-1.973 -37.685,-1.622 U3.1@-37.685,-0.595
NetC15_2: C15.2 U3.23 | length 1.7
  Bottom Layer w0.203: C15.2@-37.036,-2.739 -36.535,-2.238 U3.23@-36.535,-1.245
NetC16_1: C16.1 U3.2 | length 1.9
  Bottom Layer w0.254: C16.1@-39.507,-0.309 -39.293,-0.095 U3.2@-37.685,-0.095
NetC16_2: C16.2 U3.24 | length 3.4
  Top Layer w0.254: v1(-38.346,-1.309) -37.754,-1.901 v1(-37.035,-1.901) v1@-37.035,-1.977
  Bottom Layer w0.254: C16.2@-39.507,-1.309 v1(-38.346,-1.309) ; v1(-37.035,-1.901) U3.24@-37.035,-1.245
NetC18_1: C18.1 U3.22 | length 1.2
  Bottom Layer w0.203: -36.035,-1.609 -36.035,-2.556 C18.1@-35.852,-2.739
NetCRX0_1: CRX0.1 R1.2 | length 28.2
  Top Layer w0.203: v1(344.261,60.757) 345.67,58.192 CRX0.1@345.143,55.159
  Bottom Layer w0.203: 329.071,74.589 337.07,72.8 v1@344.271,60.763
NetCRX1_1: CRX1.1 R7.2 | length 31.2
  Top Layer w0.254: CRX1.1@307.848,52.826 307.011,52.661 306.529,53.519 307.494,56.116 309.348,57.851 v1(311.032,60.879)
  Bottom Layer w0.254: v1(311.032,60.879) 317.157,71.675 324.54,75.071
NetD1_2: D1.2 U3.19 | length 36.9
  Top Layer w0.254: v1(-31.488,-1.495) -30.353,-2.63 ; 308.971,18.422 310.135,18.422
  Top Layer w0.381: 310.135,18.422 v2(337.304,18.422)
  Bottom Layer w0.254: U3.19@-34.535,-1.245 -33.621,-1.245 -33.372,-1.495 v1(-31.488,-1.495)
  Bottom Layer w0.381: v2(337.304,18.422) 338.441,19.559 338.441,21.789
NetD2_2: D2.2 U3.18 | length 27.6
  Top Layer w0.254: v1(-30.878,-0.961) -30.878,-1.146 -30.233,-1.792 ; 309.091,19.26 310.135,19.26
  Top Layer w0.381: 310.135,19.26 v2(329.941,19.26)
  Bottom Layer w0.254: U3.18@-33.885,-0.595 -33.636,-0.595 -33.27,-0.961 v1(-30.878,-0.961)
  Bottom Layer w0.381: v2(329.941,19.26) 329.941,21.789
NetD3_2: D3.2 U3.17 | length 18.1
  Top Layer w0.381: 309.233,20.091 v2(321.464,20.091)
  Bottom Layer w0.254: U3.17@-33.885,-0.095 -33.345,-0.095 -33.055,-0.385 -30.667,-0.385 v1(-30.091,-0.961)
  Bottom Layer w0.635: 321.441,21.789 cw(c321.386,21.734) 321.464,21.734 v2(321.464,20.091)
NetD4_2: D4.2 U3.16 | length 7.4
  Bottom Layer w0.254: U3.16@-33.885,0.405 -32.861,0.405
  Bottom Layer w0.508: -32.861,0.405 -32.785,0.405 -32.326,0.863 D4.2@-26.687,0.863
NetD5_1: D5.1 R2.2
NetD6_1: D6.1 R6.2
NetJ1_11: J1.11 L2.1 TP13.1 | length 12.3
  Top Layer w0.203: v1(316.977,41.944) J1.11@316.977,46.546 ; v1(317.603,29.78) TP13.1@317.603,30.491
  Bottom Layer w0.203: J1.11@316.977,46.546 v1(316.977,41.944) 316.977,40.665 317.576,40.066 317.576,39.809
NetJ1_12: J1.12 L1.1 | length 10.9
  Top Layer w0.203: v1(316.477,42.262) J1.12@316.477,46.546
  Bottom Layer w0.203: 316.477,39.893 v1(316.477,42.262) J1.12@316.477,46.546
NetQ1_3: Q1.3 R2.1 | length 4.4
  Bottom Layer w0.254: R2.1@-60.565,12.892 -59.973,12.892 -59.528,13.337 -59.528,14.378 -59.014,14.892 -57.622,14.892
NetQ2_3: Q2.3 R6.1
NetR3_1: R3.1 R5.1 U1.6
NetR8_1: R8.1 R12.1 U2.6
NetR10_2: R10.2 U3.6 | length 1.9
  Bottom Layer w0.203: R10.2@-39.5,2.159 -38.774,2.159 -38.52,1.905 U3.6@-37.685,1.905
NetR11_2: R11.2 U3.10 | length 4.7
  Top Layer w0.152: v1(-38.778,3.223) -38.759,3.204 v1@-35.56,3.204
  Top Layer w0.203: v1@-35.56,3.204 v1(-35.535,3.23)
  Bottom Layer w0.152: U3.10@-35.535,2.555 v1(-35.535,3.23)
  Bottom Layer w0.203: R11.2@-39.522,3.23 -38.784,3.23 v1(-38.778,3.223) ; v1(-35.535,3.23) v1@-35.535,3.281
NetTP14_1: TP14.1 U3.11 | length 1.8
  Top Layer w0.203: v1(-35.035,3.509) -34.458,3.509 TP14.1@-34.285,3.336
  Bottom Layer w0.203: U3.11@-35.035,2.555 v1(-35.035,3.509)
NetTP15_1: TP15.1 U3.12 | length 2.7
  Top Layer w0.305: v1(-33.448,3.099) -33.279,3.268 TP15.1@-32.504,4.089
  Bottom Layer w0.152: U3.12@-34.535,2.555 -33.992,2.555 -33.617,2.93
  Bottom Layer w0.305: -33.617,2.93 v1(-33.448,3.099) v1@-33.435,3.112
NetTP16_1: TP16.1 U3.13 | length 1.5
  Top Layer w0.203: v1(-33.218,2.21) -32.558,2.21 TP16.1@-32.507,2.159
  Bottom Layer w0.203: U3.13@-33.885,1.905 -33.523,1.905 v1(-33.218,2.21)
NetTP17_1: TP17.1 U3.15
NetTP18_1: TP18.1 U3.14
SCL: J1.10 TP1.1 U3.9 U7.10 | length 175.7
  Top Layer w0.152: -40.508,3.687 -38.473,3.687 -38.346,3.56 -36.263,3.56 -36.143,3.681 v1(-35.984,3.681) ; v1@-35.987,3.684 -34.214,5.456 -27.783,5.456 -26.979,6.26 ; 312.345,27.312 315.374,27.312 ccw(c315.374,28.873) 316.477,27.769 ccw(c315.851,28.396) 316.737,28.396 316.737,40.196 v1(317.483,40.942)
  Top Layer w0.203: -46.41,10.205 ccw(c-43.87,10.205) -45.666,8.409 -44.734,7.477 ; TP1.1@-45.343,6.844 -44.734,7.477 ; -40.508,3.687 cw(c-40.508,4.739) -41.252,3.995 -44.734,7.477 ; U7.10@-11.538,83.095 -11.47,83.095 cw(c-11.47,82.4) -10.979,82.891 cw(c-11.408,82.462) -10.801,82.462 -10.801,81.113 cw(c-11.842,81.113) -11.106,80.377 ccw(c-10.554,79.825) -11.334,79.825 ; 292.913,37.6 311.847,69.751 312.752,71.178 315.43,73.856 cw(c316.838,72.448) 316.838,74.439 318.292,74.439 ccw(c318.292,76.357) 319.648,75.001 319.817,75.17 ccw(c318.416,76.57) 320.397,76.57 v1(320.397,78.01) 320.397,78.24 ccw(c319.356,78.24) 320.092,78.976 cw(c321.135,80.018) 319.66,80.018 319.66,106.68 cw(c320.461,106.68) 319.895,107.246 cw(c320.447,106.694) 320.447,107.474 325.695,107.474 ccw(c325.695,110.014) 327.491,108.218 327.52,108.247 ccw(c325.829,109.938) 328.22,109.938 328.22,117.006 ; 292.914,31.257 292.914,37.599 ; J1.10@317.477,46.546 317.483,46.541 v1@317.483,42.262
  Bottom Layer w0.152: -63.271,15.831 ccw(c-63.271,16.455) -62.83,16.014 ccw(c-63.486,16.669) -62.559,16.669 cw(c-61.683,16.669) -62.302,17.289 -62.102,17.489 cw(c-60.73,16.118) -60.73,18.057 -56.874,18.057 -55.723,16.906 -55.723,16.465 -54.15,14.892 -53.222,14.892 ; U3.9@-36.035,2.555 v1@-36.035,3.579 ; v1(320.397,78.01) 322.834,78.01
  Bottom Layer w0.203: J1.10@317.477,46.546 317.483,46.541 v1(317.483,42.275) v1(317.483,40.942)